# Altium PCB PCB.PcbDoc
Units mil, origin at the board's own origin, x right, y up, seen from the top; angles counter-clockwise.
Board outline 2224.41 x 2362.2 mil, 2 copper layers (Top Layer, Bottom Layer); 6 components, 4 nets, 62 pads, 0 vias.
Unrouted connection lines stored in the file: 6.
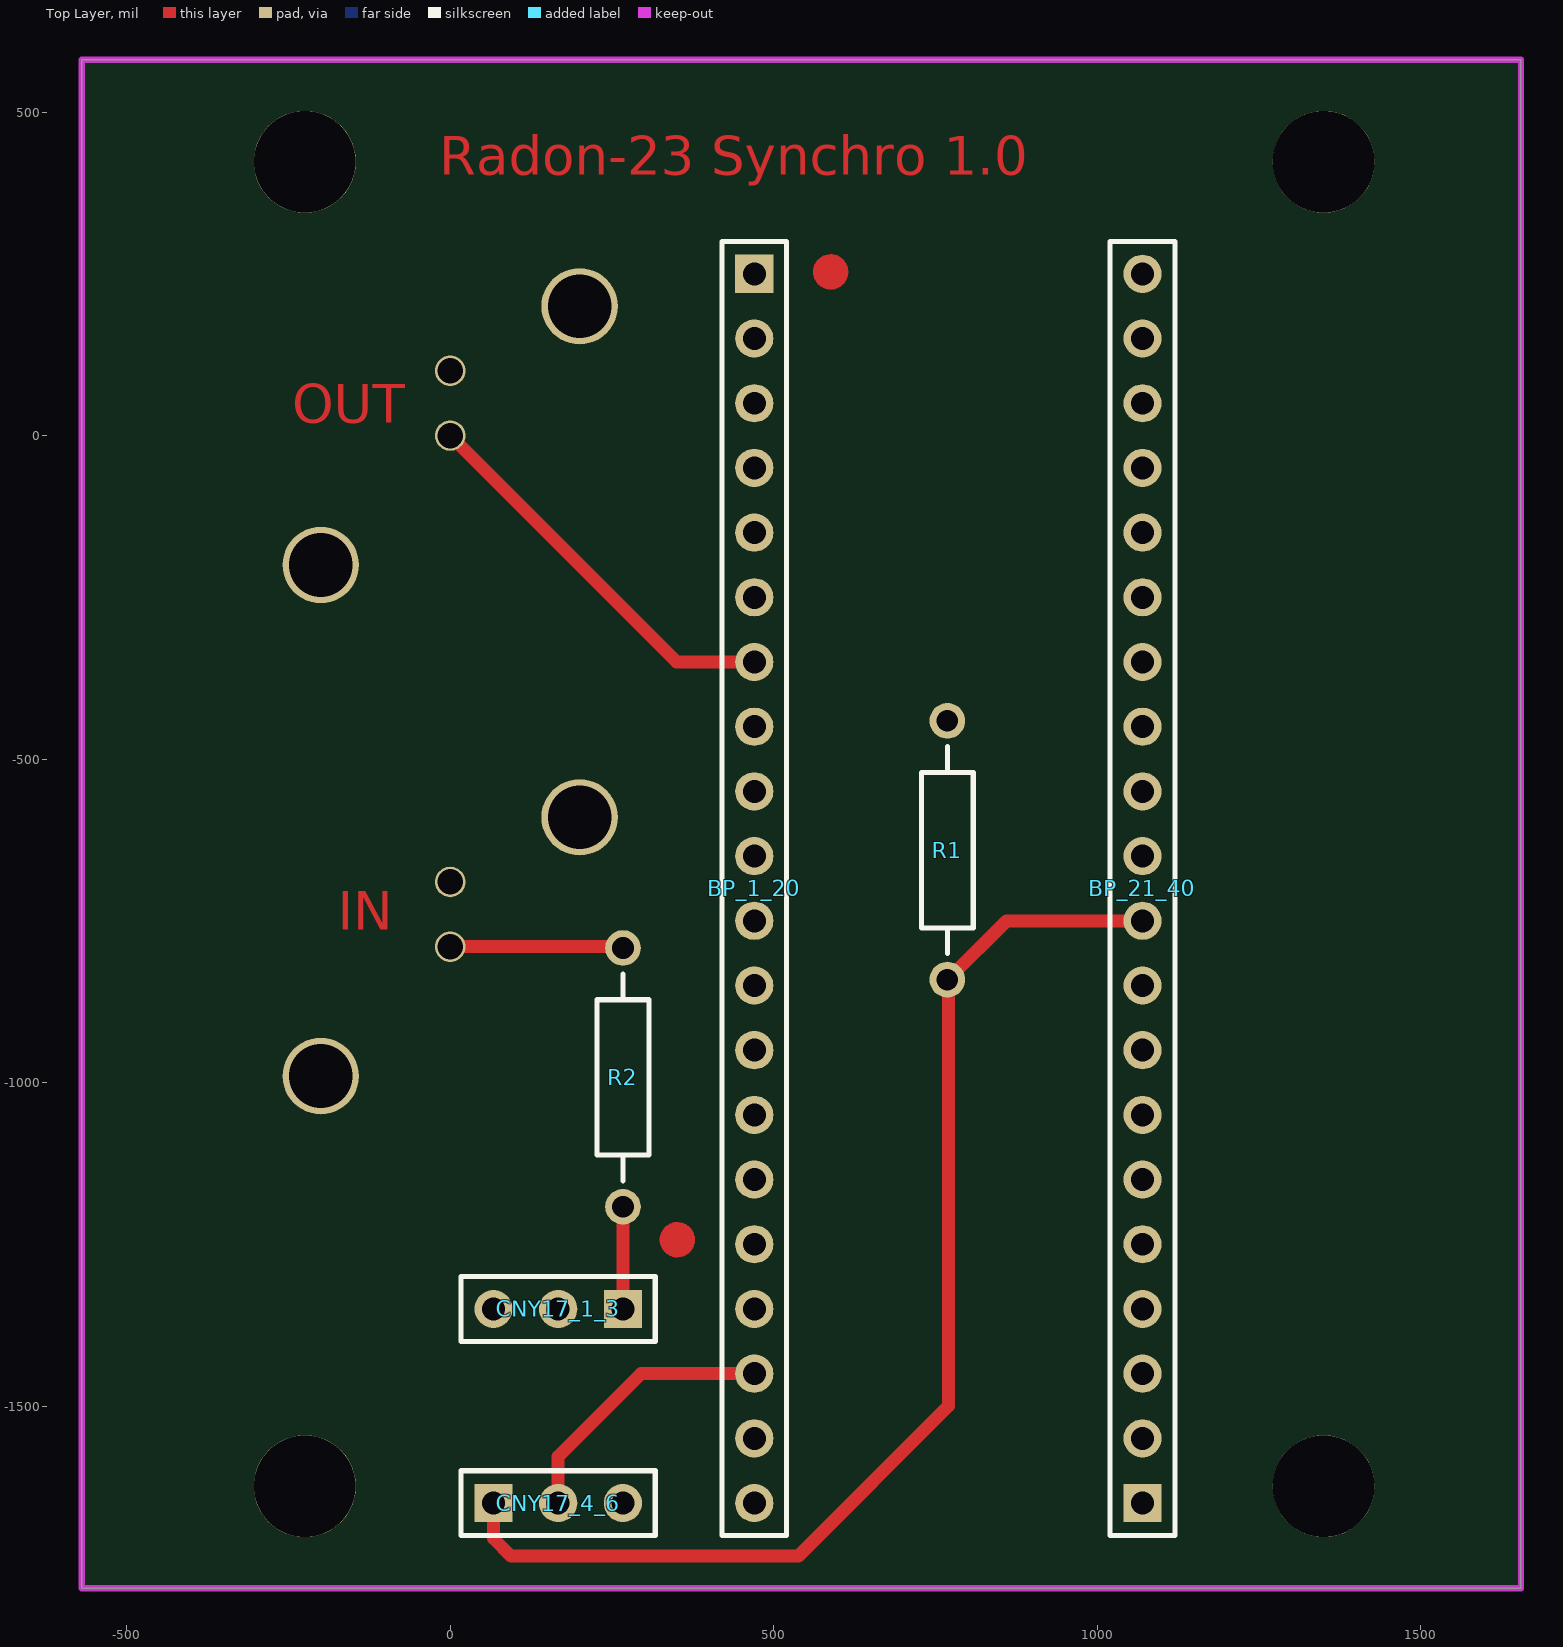
[diagram p0: Top Layer view]
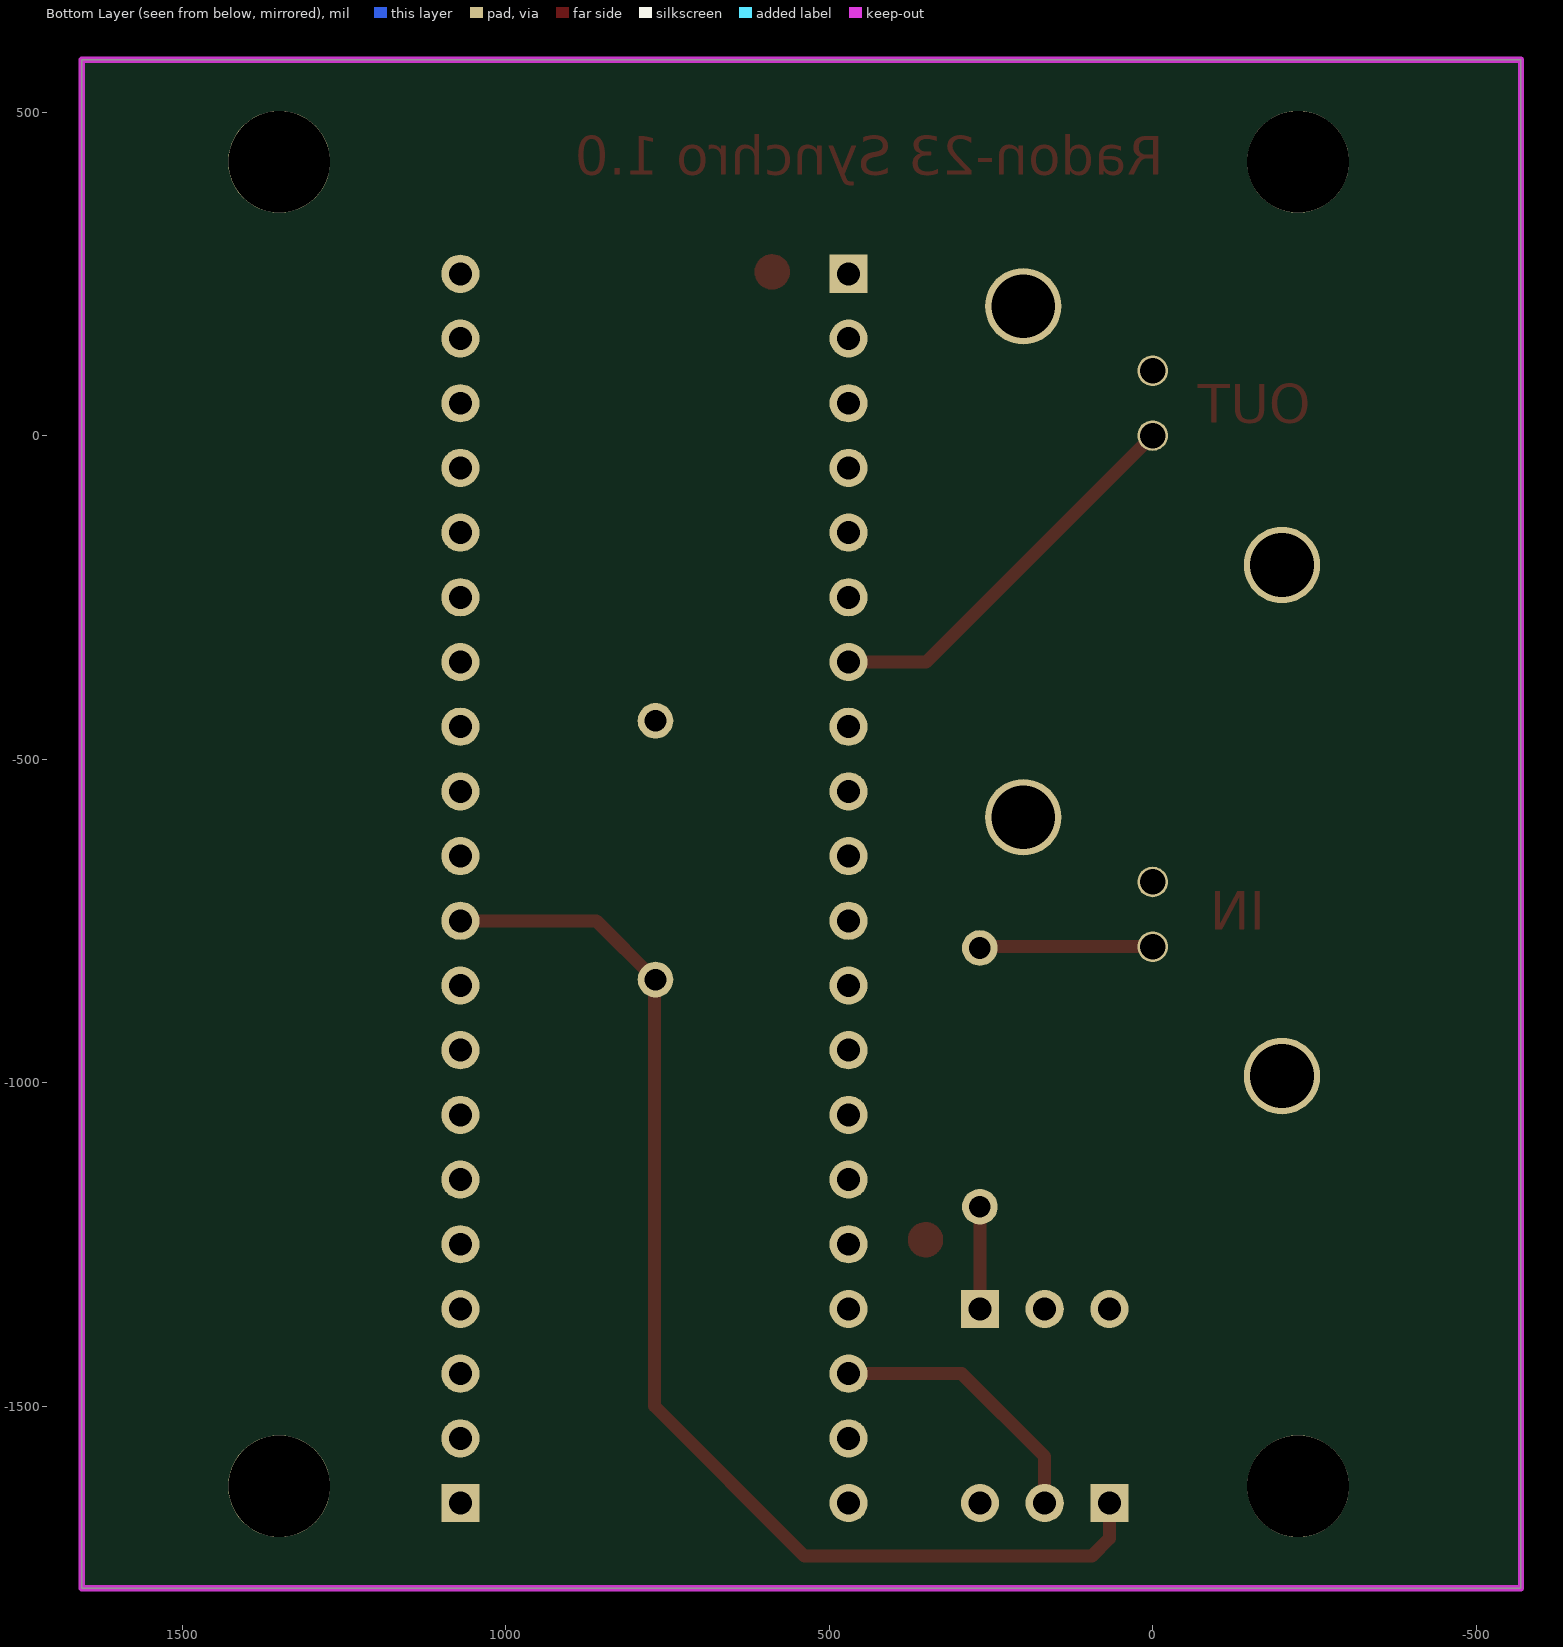
[diagram p1: Bottom Layer view, seen from below]

## Layer stack, top to bottom
Top Solder: solder mask 0.4, Solder Resist, Dk 3.5
Top Layer: signal copper 1.4
Dielectric 1: dielectric 12.6, FR-4, Dk 4.8
Bottom Layer: signal copper 1.4
Bottom Solder: solder mask 0.4, Solder Resist, Dk 3.5

## Board outline
-569.37,-1781.5 1655.04,-1781.5 1655.04,580.71 -569.37,580.71

## Design rules (kind name [scope] priority, off if disabled: settings)
Clearance [All] p1: gap=10
PolygonConnect [All] p1: connectstyle=Relief reliefconductorwidth=10 reliefentries=4 polygonreliefangle="90 Angle" airgapwidth=10
RoutingVias [All] p1: holewidth=28 width=50 viastyle="Through Hole" minholewidth=28 minwidth=50 maxholewidth=28 maxwidth=50
SolderMaskExpansion [All] p1: expansion=4
Width [All] p1: maxlimit=88.74 minlimit=10 preferedwidth=10
29 further rules are at their usual default settings.

## Components (designator, comment, footprint, x,y, rotation, side; value= is the part's Value field where it differs from the comment)
BP_1_20 "Header 20" HDR1X20 470,250 r270 top
BP_21_40 "Header 20" HDR1X20 1070,-1650 r90 top
CNY17_1_3 "Header 3" HDR1X3 266.85,-1350 r180 top
CNY17_4_6 "Header 3" HDR1X3 66.85,-1650 r0 top
R1 "5k" AXIAL-0.4 768.42,-640.87 r90 top
R2 "5k" AXIAL-0.4 267,-992 r270 top

## Footprints (in the part's own frame and the unit in brackets; to place one, negate y for a bottom-side part, rotate by r counter-clockwise, add the part's x,y. Pads: shape width x height; smd on the part's side, far side on the other; paste and mask are expansions set on the pad)
AXIAL-0.4 [mm] "Axial Device, Thru-Hole; 2 Leads; 0.4 in Pin Spacing"
  round 1.4 hole 0.85: 1(-5.08,0) 2(5.08,0)
  silkscreen extent -4.06,-1.02 4.06,1.02
HDR1X3 [mm] "Connector; Header; 3 Position"
  rect 1.5x1.5 hole 0.9: 1(0,0)
  round 1.5 hole 0.9: 2(2.54,0) 3(5.08,0)
  silkscreen extent -1.27,-1.27 6.35,1.27
HDR1X20 [mm] "Connector; Header; 20 Position"
  rect 1.5x1.5 hole 0.9: 1(0,0)
  round 1.5 hole 0.9: 2(2.54,0) 3(5.08,0) 4(7.62,0) 5(10.16,0) 6(12.7,0) 7(15.24,0) 8(17.78,0) 9(20.32,0) 10(22.86,0) 11(25.4,0) 12(27.94,0) 13(30.48,0) 14(33.02,0) 15(35.56,0) 16(38.1,0) 17(40.64,0) 18(43.18,0) 19(45.72,0) 20(48.26,0)
  silkscreen extent -1.27,-1.27 49.53,1.27

## Part data
BP_1_20 BP_21_40: "Header, 20-Pin"
CNY17_1_3 CNY17_4_6: "Header, 3-Pin"
R1 R2: library part Res2, "Resistor"

## Free pads (board coordinates)
  round 157.48 hole 157.48 unplated: 0(-224.8,-1624.02) 0(-224.8,423.23) 0(1350,-1624.02) 0(1350,423.23)
  round 47.24 hole 39.37: 1(0,-690) 1(0,100) 2(0,-790) 2(0,0)
  round 118.11 hole 98.43: 3(-200,-990) 3(-200,-200) 4(200,-590) 4(200,200)

## Nets (pads, with @x,y where several pads share a name; then routed paths per layer and width w, separated by ;. In a path a pad name is that pad's centre, name@x,y a point inside that pad or via, vN(x,y) a via of type N, cw(c..) or ccw(c..) an arc to the next point about the centre after c; other vN are vias at no path point)
GND: BP_1_20.19 BP_1_20.20 BP_21_40.19 CNY17_1_3.2 pad.1 R1.2
NetBP_21_40_10: BP_21_40.10 CNY17_4_6.1 R1.1 | length 1862.6
  Top Layer w20: CNY17_4_6.1 66.85,-1704.85 94,-1732 538,-1732 770,-1500 770,-840 860,-750 BP_21_40.10
NetCNY17_1_3_1: CNY17_1_3.1 R2.2 | length 158.1
  Top Layer w20: CNY17_1_3.1 267,-1349.85 R2.2
VDD: BP_1_20.18 CNY17_4_6.2 | length 428.1
  Top Layer w20: CNY17_4_6.2 166.85,-1578.15 295,-1450 BP_1_20.18
pads on no net: BP_1_20.1 BP_1_20.2 BP_1_20.3 BP_1_20.4 BP_1_20.5 BP_1_20.6 BP_1_20.7 BP_1_20.8 BP_1_20.9 BP_1_20.10 BP_1_20.11 BP_1_20.12 BP_1_20.13 BP_1_20.14 BP_1_20.15 BP_1_20.16 BP_1_20.17 BP_21_40.1 BP_21_40.2 BP_21_40.3 BP_21_40.4 BP_21_40.5 BP_21_40.6 BP_21_40.7 BP_21_40.8 BP_21_40.9 BP_21_40.11 BP_21_40.12 BP_21_40.13 BP_21_40.14 BP_21_40.15 BP_21_40.16 BP_21_40.17 BP_21_40.18 BP_21_40.20 CNY17_1_3.3 CNY17_4_6.3 R2.1
copper on no net: | length 1466.3
  Top Layer w10: 365.14,-1243 ccw(c351,-1243) 365.14,-1243 ; 373.36,-1243 ccw(c351,-1243) 373.36,-1243 ; 602.14,253 ccw(c588,253) 602.14,253 ; 610.36,253 ccw(c588,253) 610.36,253
  Top Layer w20: 0,-790 267,-790 ; 0,0 350,-350 470,-350
  Top Layer w30: 361,-1243 ccw(c351,-1243) 361,-1243 ; 598,253 ccw(c588,253) 598,253

## Keep-outs
Keep-Out Layer:
  the board outline again, w10

## Other copper
Top Layer:
  text "Radon-23 Synchro 1.0" at -17,403 h60
  text "OUT" at -244.09,19.68 h60
  text "IN" at -174.12,-763.78 h60